# Altium PCB main.PcbDoc
Units mm, origin at the board's own origin, x right, y up, seen from the top; angles counter-clockwise.
Board outline 73 x 48 mm, 2 copper layers (Top Layer, Bottom Layer), stack 1.571 mm thick; 62 components, 45 nets, 224 pads, 122 vias.
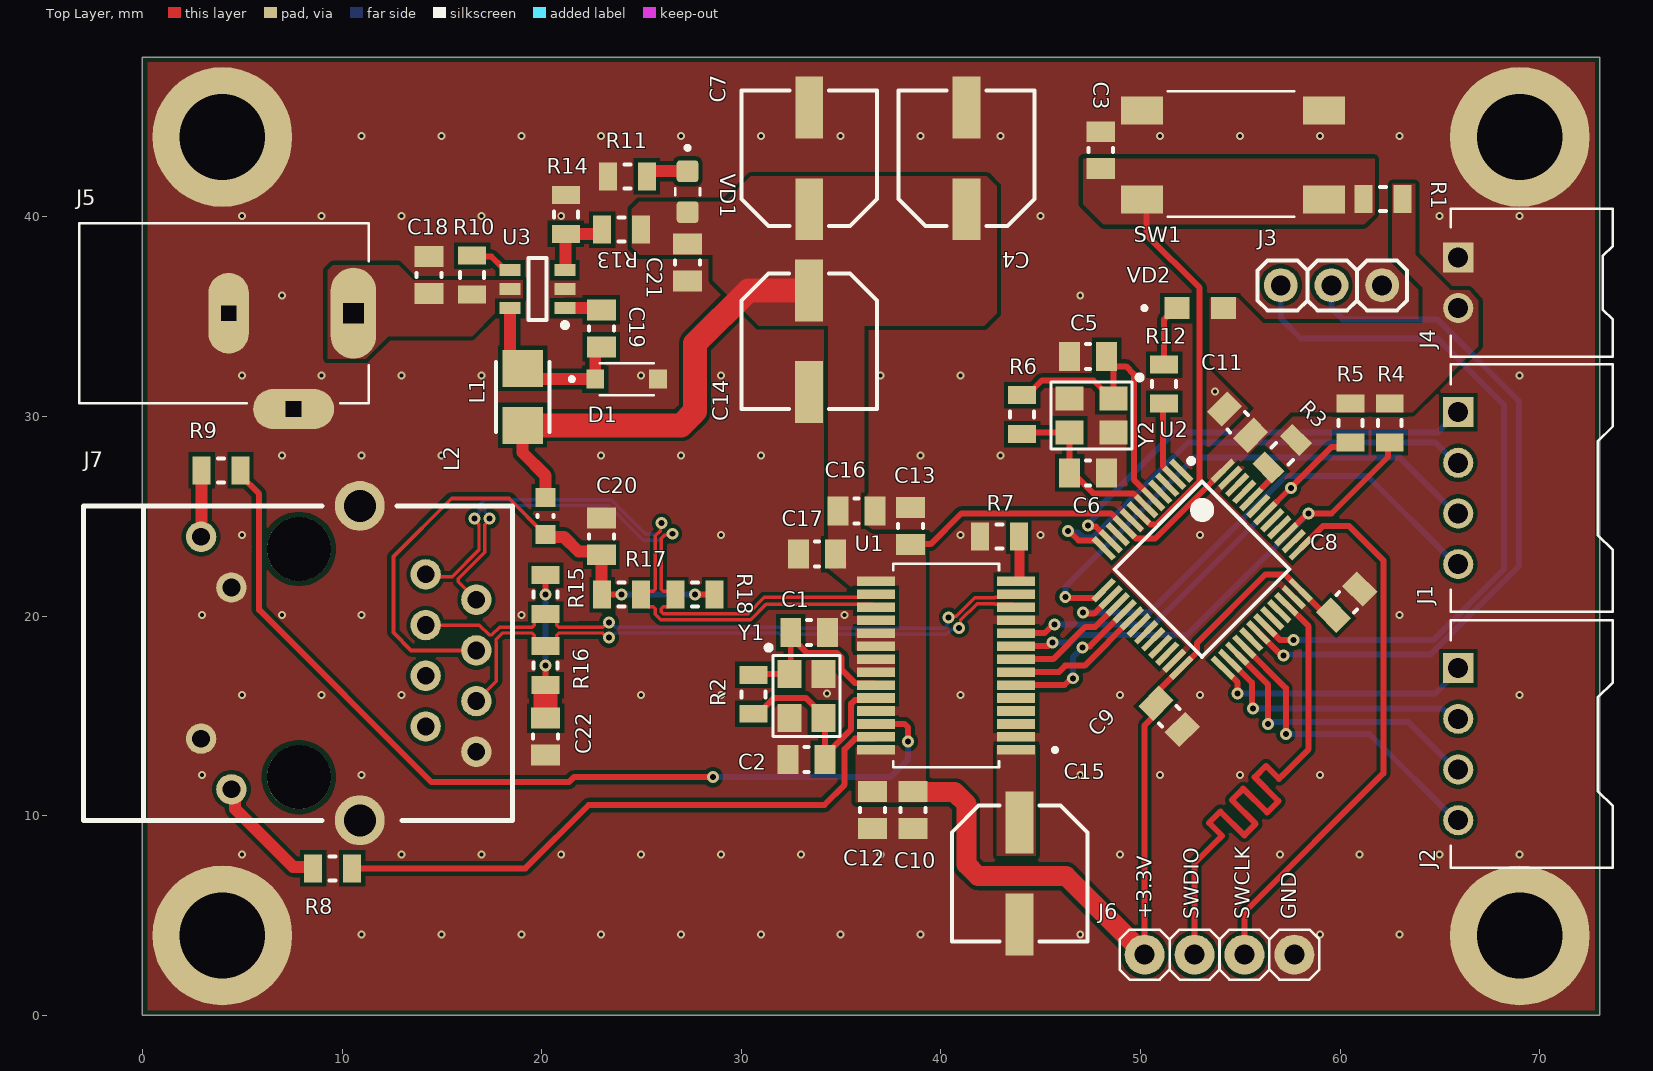
[diagram p0: Top Layer view]
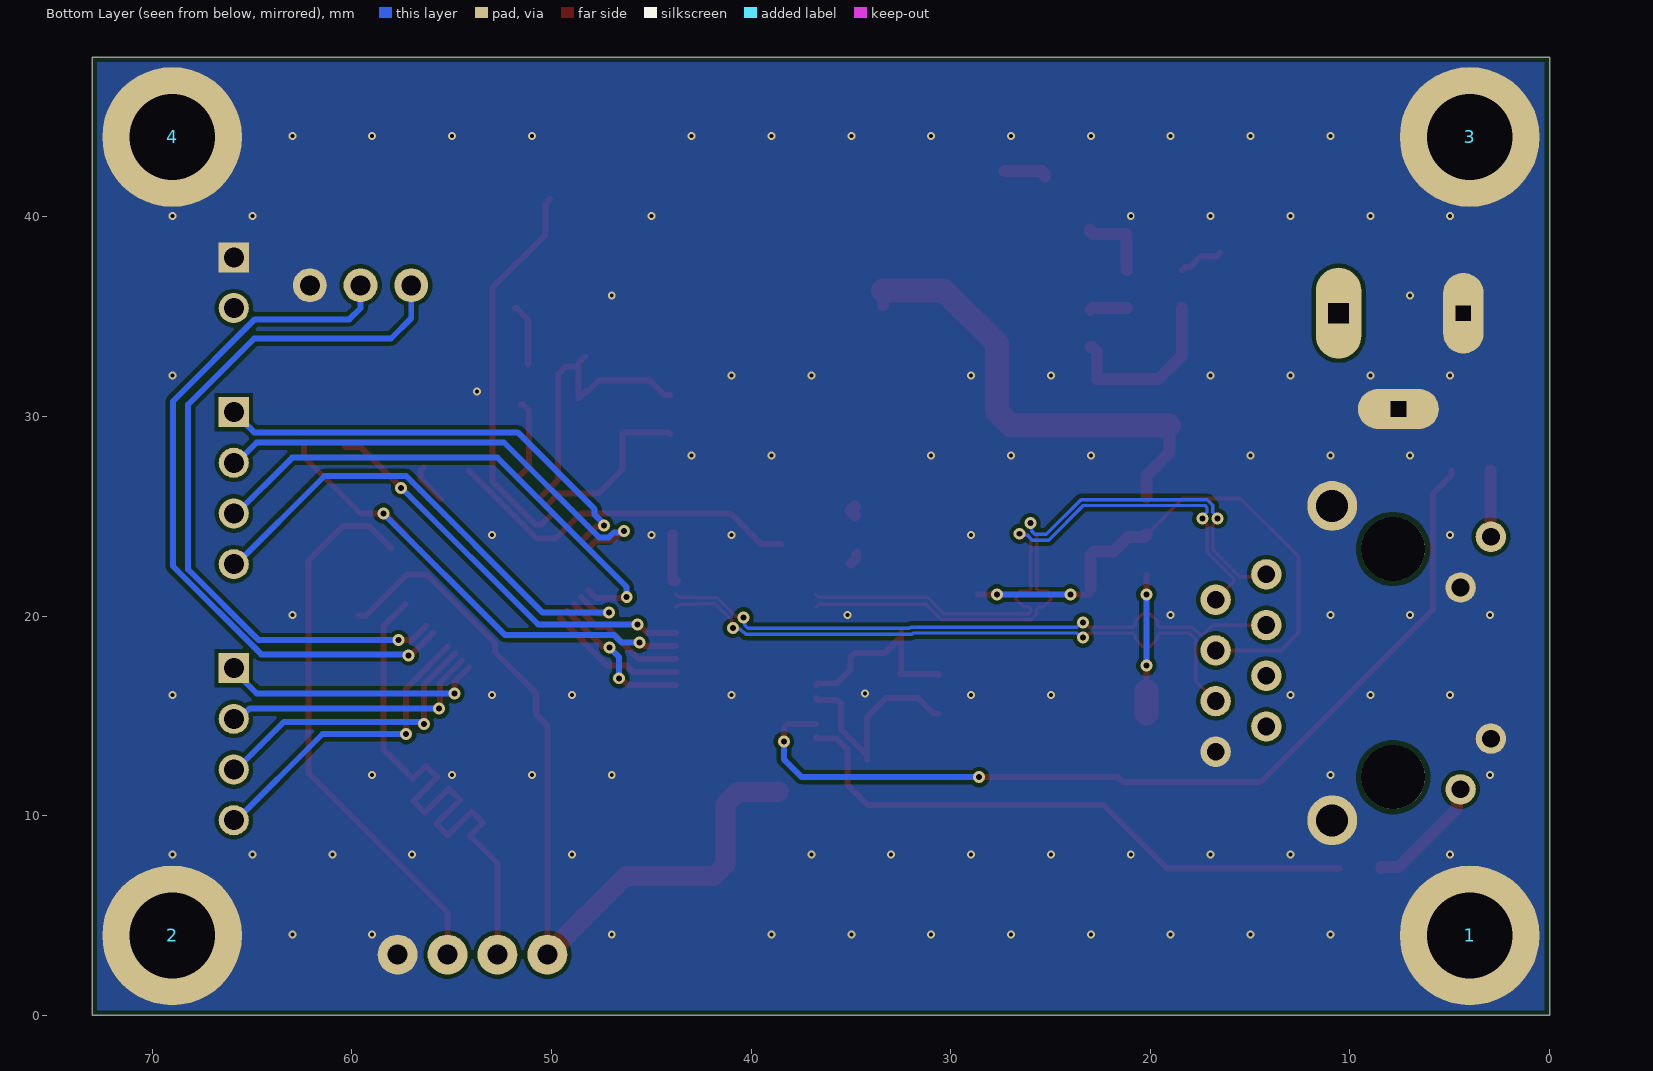
[diagram p1: Bottom Layer view, seen from below]

## Layer stack, top to bottom
Top Solder: solder mask 0.0102, Solder Resist, Dk 3.5
Top Layer: signal copper 0.0356
Dielectric 1: core 1.5, FR4 Tg135, Dk 4.5
Bottom Layer: signal copper 0.0356
Bottom Solder: solder mask 0.0102, Solder Resist, Dk 3.5

## Board outline
0,0 0,48 73,48 73,0

## Design rules (kind name [scope] priority, off if disabled: settings)
AcuteAngle [All] p1: minimum=3.50000000000000E+0001 checktracksonly=FALSE
BoardOutlineClearance "BoardOutlineClearance 1" [All] p1: gap=0.25 ignorepadtopadclearanceinfootprint=FALSE except(0: Arc-SplitContinuation Track-SplitContinuation SMDPad-SplitContinuation THPad-SplitContinuation Via-SplitContinuation Fill-SplitContinuation Poly-SplitContinuation Region-SplitContinuation Text-SplitContinuation) // Milling
BoardOutlineClearance "BoardOutlineClearance 2" [All] p2: gap=0.4 ignorepadtopadclearanceinfootprint=FALSE except(0: Arc-SplitContinuation Track-SplitContinuation SMDPad-SplitContinuation THPad-SplitContinuation Via-SplitContinuation Fill-SplitContinuation Poly-SplitContinuation Region-SplitContinuation Text-SplitContinuation) // V-Cut
Clearance "Clearance 3 Oz" [All] p1 off: gap=0.35 ignorepadtopadclearanceinfootprint=FALSE except(0.25: Arc-Hole Track-Hole SMDPad-Hole THPad-Hole Via-Hole Fill-Hole Poly-Hole Region-Hole Text-Hole)
Clearance "Clearance 2 Oz" [All] p2 off: gap=0.3 ignorepadtopadclearanceinfootprint=FALSE except(0.25: Arc-Hole Track-Hole SMDPad-Hole THPad-Hole Via-Hole Fill-Hole Poly-Hole Region-Hole Text-Hole)
Clearance "Clearance-1 1 Oz" [All] p3 off: gap=0.2 ignorepadtopadclearanceinfootprint=FALSE except(0.25: Arc-Hole Track-Hole SMDPad-Hole THPad-Hole Via-Hole Fill-Hole Poly-Hole Region-Hole Text-Hole) // Standart
Clearance "Clearance-2 1 Oz" [All] p4: gap=0.15 ignorepadtopadclearanceinfootprint=TRUE except(0.12: Track-Track; 0.2: Arc-Fill Arc-Poly Track-Fill Track-Poly SMDPad-Fill SMDPad-Poly THPad-Fill THPad-Poly Via-Fill Via-Poly Fill-Fill Fill-Poly Poly-Poly; 0.25: Arc-Hole Track-Hole SMDPad-Hole THPad-Hole Via-Hole Fill-Hole Poly-Hole Region-Hole Text-Hole) // Advance
Clearance "Clearance-1 1/2 Oz" [All] p5 off: gap=0.125 ignorepadtopadclearanceinfootprint=FALSE except(0.2: Arc-Fill Arc-Poly Track-Fill Track-Poly SMDPad-SMDPad SMDPad-Fill SMDPad-Poly THPad-Fill THPad-Poly Via-Fill Via-Poly Fill-Fill Fill-Poly Poly-Poly Poly-Region Poly-Text; 0.25: Arc-Hole Track-Hole SMDPad-Hole THPad-Hole Via-Hole Fill-Hole Poly-Hole Region-Hole Text-Hole) // Standart
Clearance "Clearance-2 1/2 Oz" [All] p6 off: gap=0.1 ignorepadtopadclearanceinfootprint=FALSE except(0.15: Arc-Fill Arc-Poly Track-Fill Track-Poly SMDPad-SMDPad SMDPad-Fill SMDPad-Poly THPad-Fill THPad-Poly Via-Fill Via-Poly Fill-Fill Fill-Poly Poly-Poly Poly-Region Poly-Text; 0.25: Arc-Hole Track-Hole SMDPad-Hole THPad-Hole Via-Hole Fill-Hole Poly-Hole Region-Hole Text-Hole) // Advance
DiffPairsRouting "Schematic Differential Pairs Routing_1" [InDifferentialPairClass('ETH_TX_IO_LINES')] p1: maxlimit=0.127 minlimit=0.127 mostfreqgap=0.127 toplayer_minwidth=0.17 toplayer_maxwidth=0.17 toplayer_prefwidth=0.17 bottomlayer_minwidth=0.17 bottomlayer_maxwidth=0.17 bottomlayer_prefwidth=0.17 impedanceprofiledriven=TRUE impedanceprofileid={BAA0B96C-9F9F-4328-87B9-B46D77609CF9} impedanceprofilevalue=100.000000 maxuncoupledlength=12.7
DiffPairsRouting "DiffPairsRoutingRx 1 Oz" [InDifferentialPairClass('ETH_RX_IO_LINES')] p2: maxlimit=0.127 minlimit=0.127 mostfreqgap=0.127 toplayer_minwidth=0.17 toplayer_maxwidth=0.17 toplayer_prefwidth=0.17 bottomlayer_minwidth=0.17 bottomlayer_maxwidth=0.17 bottomlayer_prefwidth=0.17 impedanceprofiledriven=TRUE impedanceprofileid={BAA0B96C-9F9F-4328-87B9-B46D77609CF9} impedanceprofilevalue=100.000000 maxuncoupledlength=12.7
HoleSize "Minimum HoleSize" [IsPad] p1: absolutevalues=TRUE maxlimit=5.9 minlimit=0.6 maxpercent=80.000 minpercent=20.000
HoleSize "Minimum HoleSize VIA 1" [IsVia] p2: absolutevalues=TRUE maxlimit=5.9 minlimit=0.3 maxpercent=80.000 minpercent=20.000 // Standart
HoleSize "Minimum HoleSize VIA 2" [IsVia] p3: absolutevalues=TRUE maxlimit=5.9 minlimit=0.2 maxpercent=80.000 minpercent=20.000 // Advance
HoleToHoleClearance Hole2HoleClearance [All] p1: gap=0.25 allowstackedmicrovias=FALSE
MinimumAnnularRing "Minimum AR VIA Standart" [IsVia] p1: minimumring=0.15
MinimumAnnularRing "Minimum AR PAD Standart" [IsPAD] p2: minimumring=0.2
MinimumAnnularRing "Minimum AR VIA Advance" [IsVia] p3: minimumring=0.1
MinimumAnnularRing "Minimum AR PAD Advance" [IsPAD] p4: minimumring=0.15
MinimumSolderMaskSliver "SolderMask Bridge Standart" [All] p1: minsoldermaskwidth=0.15 // All Masks
MinimumSolderMaskSliver "SolderMask Bridge Advance" [All] p2: minsoldermaskwidth=0.1 // Mask LDI
PlaneClearance "PlaneClearance 3 Oz" [All] p1: clearance=0.35
PlaneClearance "PlaneClearance 2 Oz" [All] p2: clearance=0.3
PlaneClearance "PlaneClearance 1 Oz" [All] p3: clearance=0.2
PlaneClearance "PlaneClearance-1 1/2 Oz" [All] p4: clearance=0.2 // Standart
PlaneClearance "PlaneClearance-2 1/2 Oz" [All] p5: clearance=0.15 // Advance
PlaneConnect "TermalConnect 3 Oz" [All] p1 off: planeconnectstyle=Relief reliefexpansion=0.2 reliefentries=4 reliefconductorwidth=0.35 reliefairgap=0.35 // Standart
PlaneConnect "TermalConnect 2 Oz" [All] p2 off: planeconnectstyle=Relief reliefexpansion=0.2 reliefentries=4 reliefconductorwidth=0.3 reliefairgap=0.3 // Standart
PlaneConnect "TermalConnect-1 1 Oz" [All] p3 off: planeconnectstyle=Relief reliefexpansion=0.2 reliefentries=4 reliefconductorwidth=0.2 reliefairgap=0.2 // Standart
PlaneConnect "TermalConnect-2 1 Oz" [All] p4: planeconnectstyle=Direct reliefexpansion=0.15 reliefentries=4 reliefconductorwidth=0.2 reliefairgap=0.2 // Advance
PlaneConnect "TermalConnect-1 1/2 Oz" [All] p5 off: planeconnectstyle=Relief reliefexpansion=0.2 reliefentries=4 reliefconductorwidth=0.2 reliefairgap=0.2 // Standart
PlaneConnect "TermalConnect-2 1/2 Oz" [All] p6 off: pad.planeconnectstyle=Relief pad.reliefexpansion=0.15 pad.reliefentries=4 pad.reliefconductorwidth=0.15 pad.reliefairgap=0.15 via.planeconnectstyle=Direct via.reliefexpansion=0.15 via.reliefentries=4 via.reliefconductorwidth=0.15 via.reliefairgap=0.15 // Advance
PolygonConnect "PolygonConnect 3 Oz" [All] p1 off: thpad.connectstyle=Relief thpad.reliefconductorwidth=0.35 thpad.reliefentries=4 thpad.polygonreliefangle="90 Angle" thpad.airgapwidth=0.35 smdpad.connectstyle=Relief smdpad.reliefconductorwidth=0.35 smdpad.reliefentries=4 smdpad.polygonreliefangle="90 Angle" smdpad.airgapwidth=0.35 via.connectstyle=Direct via.reliefconductorwidth=0.254 via.reliefentries=4 via.polygonreliefangle="90 Angle" via.airgapwidth=0.254
PolygonConnect "PolygonConnect 2 Oz" [All] p2 off: thpad.connectstyle=Relief thpad.reliefconductorwidth=0.3 thpad.reliefentries=4 thpad.polygonreliefangle="90 Angle" thpad.airgapwidth=0.3 smdpad.connectstyle=Relief smdpad.reliefconductorwidth=0.3 smdpad.reliefentries=4 smdpad.polygonreliefangle="90 Angle" smdpad.airgapwidth=0.3 via.connectstyle=Direct via.reliefconductorwidth=0.254 via.reliefentries=4 via.polygonreliefangle="90 Angle" via.airgapwidth=0.254
PolygonConnect "PolygonConnect-1 1 Oz" [All] p3 off: thpad.connectstyle=Relief thpad.reliefconductorwidth=0.2 thpad.reliefentries=4 thpad.polygonreliefangle="90 Angle" thpad.airgapwidth=0.2 smdpad.connectstyle=Relief smdpad.reliefconductorwidth=0.2 smdpad.reliefentries=4 smdpad.polygonreliefangle="90 Angle" smdpad.airgapwidth=0.2 via.connectstyle=Direct via.reliefconductorwidth=0.254 via.reliefentries=4 via.polygonreliefangle="90 Angle" via.airgapwidth=0.254 // Standart
PolygonConnect "PolygonConnect-2 1 Oz" [All] p4: connectstyle=Direct reliefconductorwidth=0.15 reliefentries=4 polygonreliefangle="90 Angle" airgapwidth=0.15 // Advance
PolygonConnect "PolygonConnect-1 1/2 Oz" [All] p5 off: thpad.connectstyle=Relief thpad.reliefconductorwidth=0.15 thpad.reliefentries=4 thpad.polygonreliefangle="90 Angle" thpad.airgapwidth=0.2 smdpad.connectstyle=Relief smdpad.reliefconductorwidth=0.2 smdpad.reliefentries=4 smdpad.polygonreliefangle="90 Angle" smdpad.airgapwidth=0.2 via.connectstyle=Direct via.reliefconductorwidth=0.254 via.reliefentries=4 via.polygonreliefangle="90 Angle" via.airgapwidth=0.254 // Standart
PolygonConnect "PolygonConnect-2 1/2 Oz" [All] p6 off: thpad.connectstyle=Relief thpad.reliefconductorwidth=0.125 thpad.reliefentries=4 thpad.polygonreliefangle="90 Angle" thpad.airgapwidth=0.15 smdpad.connectstyle=Relief smdpad.reliefconductorwidth=0.125 smdpad.reliefentries=4 smdpad.polygonreliefangle="90 Angle" smdpad.airgapwidth=0.15 via.connectstyle=Direct via.reliefconductorwidth=0.254 via.reliefentries=4 via.polygonreliefangle="90 Angle" via.airgapwidth=0.254 // Advance
RoutingCorners [All] p1 off: cornerstyle=45-Degree minsetback=2.54 maxsetback=2.54
RoutingVias [All] p1: holewidth=0.3 width=0.6 viastyle="Through Hole" minholewidth=0.2 minwidth=0.4 maxholewidth=5.9 maxwidth=6.4
SilkToSilkClearance Silk2SilkClearance [All] p1 off: silktosilkclearance=0.15
SilkToSolderMaskClearance Silk2SolderMaskClearance [IsPad] p1 off: minsilkscreentomaskgap=0.15 clearancetoexposedcopper=TRUE
SolderMaskExpansion SolderMaskExpansion-1 [All] p1: expansion=0.05 istentingtop=FALSE // Standart
SolderMaskExpansion "SolderMaskExpansion LDI" [All] p2: expansion=0.025 istentingtop=FALSE // Advance
UnRoutedNet [All] p1: checkbadconnections=TRUE
Width "Width 3 Oz" [All] p1 off: maxlimit=10 minlimit=0.35 preferedwidth=0.4 checkconnectedcopper=TRUE
Width "Width 2 Oz" [All] p2 off: maxlimit=10 minlimit=0.3 preferedwidth=0.35 minimp=50.000000 maximp=50.000000 favimp=50.000000 checkconnectedcopper=TRUE
Width "Width 1 Oz" [All] p3: maxlimit=1.2 minlimit=0.2 preferedwidth=0.3 checkconnectedcopper=TRUE
Width "Width 1/2 Oz" [All] p4 off: maxlimit=10 minlimit=0.1 preferedwidth=0.125 checkconnectedcopper=TRUE
20 further rules are at their usual default settings.

## Classes and differential pairs
differential pair class ETH_TX_IO_LINES: TPOUT
differential pair class ETH_RX_IO_LINES: TPIN
net class Ethernet: TPIN_N TPIN_P TPOUT_N TPOUT_P
differential pair TPOUT: +TPOUT_P -TPOUT_N
differential pair TPIN: +TPIN_P -TPIN_N

## Components (designator, comment, footprint, x,y, rotation, side; value= is the part's Value field where it differs from the comment)
1 "SMTSO_STAND_M3" M3x1 4,4 r90 bottom
2 "SMTSO_STAND_M3" M3x1 69,4 r90 bottom
3 "SMTSO_STAND_M3" M3x1 4,44 r90 bottom
4 "SMTSO_STAND_M3" M3x1 69,44 r90 bottom
C1 "22pF" 0805_MD_CAPC2012X05N 33.401,19.171 r180 top
C2 "22pF" 0805_MD_CAPC2012X05N 33.274,12.821 r0 top
C3 "1uF" 0805_MD_CAPC2012X05N 48.006,43.337 r90 top
C4 "2.2uF" 6.3x5.4_HD_CAPAE7266X54L 41.277,42.932 r90 top
C5 "10pF" 0805_MD_CAPC2012X05N 47.371,33.014 r0 top
C6 "10pF" 0805_MD_CAPC2012X05N 47.371,27.172 r180 top
C7 "2.2uF" 6.3x5.4_HD_CAPAE7266X54L 33.403,42.932 r90 top
C8 "100nF" 0805_MD_CAPC2012X05N 60.325,20.695 r45 top
C9 "100nF" 0805_MD_CAPC2012X05N 51.435,14.98 r315 top
C10 "100nF" 0805_MD_CAPC2012X05N 38.608,10.281 r270 top
C11 "100nF" 0805_MD_CAPC2012X05N 54.864,29.712 r135 top
C12 "10nF" 0805_MD_CAPC2012X05N 36.576,10.281 r90 top
C13 "10nF" 0805_MD_CAPC2012X05N 38.481,24.505 r270 top
C14 "10uF" 6.3x5.4_HD_CAPAE7266X54L 33.401,33.766 r270 top
C15 "10uF" 6.3x5.4_HD_CAPAE7266X54L 43.942,7.106 r270 top
C16 "10nF" 0805_MD_CAPC2012X05N 35.778,25.267 r0 top
C17 "10nF" 0805_MD_CAPC2012X05N 33.782,23.108 r180 top
C18 "10uF" 0805_MD_CAPC2012X05N 14.351,37.078 r90 top
C19 "100nF" 0805_MD_CAPC2012X05N 22.987,34.411 r270 top
C20 "10nF" 0805_MD_CAPC2012X05N 22.987,23.997 r90 top
C21 "10uF" 0805_MD_CAPC2012X05N 27.305,37.713 r270 top
C22 "10nF" 0805_MD_CAPC2012X05N 20.193,13.964 r270 top
D1 "SD103AW_RHG" DIO_SD103AW_RHG 24.257,31.871 r0 top
J1 "HX2.54-4P" JST_S4B-XH-A(LF)(SN) 65.913,26.41 r270 top
J2 "HX2.54-4P" JST_S4B-XH-A(LF)(SN) 65.913,13.583 r270 top
J3 "PLS-3" PLS-1-3 57.023,36.57 r90 top
J4 "HX2.54-2P" JST_S2B-XH-A(LF)(SN) 65.913,36.697 r270 top
J5 "RAPC712BKZ" SWITCHCRAFT_RAPC712BKZ 4.318,35.173 r270 top
J6 "SWD" SWD-4 55.205,3.042 r90 top
J7 "RJ-45 Jack" J011D21BNL 7.747,17.52 r270 top
L1 "22uH" LQH32P_MD_INDP3225X17N 19.05,30.982 r270 top
L2 "L" 0603_LD_RESC1608X06M 20.193,25.013 r270 top
R1 "10k" 0805_MD_RESC2012X06N 62.144,40.888 r0 top
R2 "1M" 0805_MD_RESC2012X06N 30.607,16.082 r90 top
R3 "10k" 0805_MD_RESC2012X06N 57.096,28.134 r225 top
R4 "10k" 0805_MD_RESC2012X06N 62.484,29.671 r90 top
R5 "10k" 0805_MD_RESC2012X06N 60.515,29.671 r90 top
R6 "1M" 0805_MD_RESC2012X06N 44.069,30.093 r90 top
R7 "10k" 0805_MD_RESC2012X06N 42.926,23.997 r0 top
R8 "10k" 0805_MD_RESC2012X06N 9.525,7.36 r0 top
R9 "10k" 0805_MD_RESC2012X06N 3.937,27.299 r0 top
R10 "10k" 0805_MD_RESC2012X06N 16.51,37.078 r270 top
R11 "510" 0805_MD_RESC2012X06N 24.298,42.031 r180 top
R12 "510" 0805_MD_RESC2012X06N 51.181,31.617 r270 top
R13 "" 0805_MD_RESC2012X06N 24.003,39.364 r0 top
R14 "" 0805_MD_RESC2012X06N 21.209,40.126 r270 top
R15 "49.9" 0805_MD_RESC2012X06N 20.193,21.076 r90 top
R16 "49.9" 0805_MD_RESC2012X06N 20.193,17.52 r270 top
R17 "49.9" 0805_MD_RESC2012X06N 24.003,21.076 r180 top
R18 "49.9" 0805_MD_RESC2012X06N 27.686,21.076 r0 top
SW1 "LL3301" LL3301 50.082,45.333 r270 top
U1 "ENC28J60/SS" SOP65P780X200-28N 40.259,17.52 r180 top
U2 "GD32F103C8T6" QFP48_MD_TSQFP50P900X900X120-48N 53.086,22.346 r315 top
U3 "AOZ1282CI" SOT23_6_MD_SOT95P280X125-6N 19.79,36.377 r180 top
VD1 "LED" LEDSC125X200X90-2N 27.305,41.26 r270 top
VD2 "LED" LED_APT2012MGC 52.991,35.427 r0 top
Y1 "3225" YANGXING_SMD_3225_4L 33.274,16.002 r270 top
Y2 "X32258MOB4SI" YANGXING_SMD_3225_4L 47.541,30.054 r180 top

## Footprints (in the part's own frame and the unit in brackets; to place one, negate y for a bottom-side part, rotate by r counter-clockwise, add the part's x,y. Pads: shape width x height; smd on the part's side, far side on the other; paste and mask are expansions set on the pad)
6.3x5.4_HD_CAPAE7266X54L [mm] "Aluminum Electrolytic Capacitor, Body 6.60x6.60x5.40mm, IPC High Density"
  rect 3.1x1.4 smd: 1(-2.55,0) 2(2.55,0)
  silkscreen extent -3.4,-3.4 3.4,3.4, body extent -3.9,-3.3 3.9,3.3, height 5.4
0603_LD_RESC1608X06M [mm] "Chip Resistor, 2-Leads, Body 1.60x0.80mm, IPC Low Density"
  rect 0.95x1 smd: 1(-0.925,0) 2(0.925,0)
  silkscreen extent -0.05,-0.4 0.05,0.4, body extent -0.8,-0.4 0.8,0.4, height 0.8
0805_MD_CAPC2012X05N [mm] "Chip Capacitor, 2-Leads, Body 2.00x1.25mm, IPC Medium Density"
  rect 1.05x1.45 smd: 1(-0.925,0) 2(0.925,0)
  silkscreen extent -0.1,-0.63 0.1,0.63, body extent -1,-0.63 1,0.63, height 1.25
0805_MD_RESC2012X06N [mm] "Chip Resistor, 2-Leads, Body 2.00x1.25mm, IPC Medium Density"
  rect 0.9x1.4 smd: 1(-0.975,0) 2(0.975,0)
  silkscreen extent -0.15,-0.6 0.15,0.6, body extent -1,-0.6 1,0.6, height 0.45
DIO_SD103AW_RHG [mm]
  rect 0.9x0.95 smd: A(1.575,0) C(-1.575,0)
  silkscreen extent -2.85,-0.8 1.35,0.8
J011D21BNL [mm] "RJ45 Jack with Transformers and Lights"
  round 1.524 hole 0.89: 1(-4.57,6.44) 2(-3.3,8.98) 3(-2.03,6.44) 4(-0.76,8.98) 5(0.51,6.44) 6(1.78,8.98) 7(3.05,6.44) 8(4.32,8.98) 9(-6.45,-4.81) 10(-3.91,-3.29) 11(3.66,-4.81) 12(6.2,-3.29)
  round 2.5 hole 1.6: 13(-8,3.14) 14(7.75,3.14)
  round 3.2 hole 3.2 unplated: 15(-5.84,0.09) 16(5.59,0.09)
  silkscreen extent -8,-10.7 7.75,10.8, body extent -8.5,-10.8 8.5,11.25, height 13.8
JST_S2B-XH-A(LF)(SN) [mm]
  rect 1.508x1.508 / inner round 1.508 / far side rect 1.508x1.508 hole 1: 1(-1.27,0)
  round 1.508 hole 1: 2(1.27,0)
  silkscreen extent -3.7,-0.38 3.7,7.75, body extent -3.61,-0.38 3.61,7.66, height 5.89
JST_S4B-XH-A(LF)(SN) [mm]
  rect 1.508x1.508 / inner round 1.508 / far side rect 1.508x1.508 hole 1: 1(-3.81,0)
  round 1.508 hole 1: 2(-1.27,0) 3(1.27,0) 4(3.81,0)
  silkscreen extent -6.2,-0.38 6.2,7.75, body extent -6.15,-0.38 6.15,7.66, height 5.84
LED_APT2012MGC [mm]
  rect 1.25x1.1 smd: A(1.175,0) C(-1.175,0)
  silkscreen extent -2.9,-0.1 -2.7,0.1, body extent -1,-0.63 1,0.63, height 0.75
LEDSC125X200X90-2N [mm]
  rrect25% 1.07x1.08 smd: A(1.025,0) C(-1.025,0)
  silkscreen extent -2.3,-0.63 0.17,0.63, body extent -1,-0.63 1,0.63, height 0.7
LL3301 [mm]
  rect 1.4x2.1 smd mask+0.05: 1(0,9.1) 1(0,0) 2(4.46,9.1) 2(4.46,0)
  silkscreen extent -0.95,1.27 5.33,7.63, body extent -0.79,-0.42 5.21,9.58, height 4.3
LQH32P_MD_INDP3225X17N [mm] "Precision Wire Wound Inductor, 2-Leads, Body 3.20x2.50mm, IPC Medium Density"
  rect 1.85x2.05 smd: 1(-1.425,0) 2(1.425,0)
  silkscreen extent -1.75,-1.35 1.75,1.35, body extent -1.6,-1.25 1.6,1.25, height 1.7
M3x1 [mm]
  round 7 hole 4.3: 1(0,0)
  body extent -2.8,-2.79 2.8,2.79, height 1.03
PLS-1-3 [mm]
  round 1.7 hole 1 paste-2539.97: 1(0,0) 2(0,-2.54) 3(0,-5.08)
  silkscreen extent -1.25,-6.33 1.25,1.17, body extent -1.27,-6.35 1.27,1.27, height 8.44
QFP48_MD_TSQFP50P900X900X120-48N [mm] "TSQFP, 48-Leads, Body 7.00x7.00mm, Pitch 0.50mm, IPC Medium Density"
  rect 1.45x0.3 smd: 1(-4.225,2.75) 2(-4.225,2.25) 3(-4.225,1.75) 4(-4.225,1.25) 5(-4.225,0.75) 6(-4.225,0.25) 7(-4.225,-0.25) 8(-4.225,-0.75) 9(-4.225,-1.25) 10(-4.225,-1.75) 11(-4.225,-2.25) 12(-4.225,-2.75) 25(4.225,-2.75) 26(4.225,-2.25) 27(4.225,-1.75) 28(4.225,-1.25) 29(4.225,-0.75) 30(4.225,-0.25) 31(4.225,0.25) 32(4.225,0.75) 33(4.225,1.25) 34(4.225,1.75) 35(4.225,2.25) 36(4.225,2.75)
  rect 0.3x1.45 smd: 13(-2.75,-4.225) 14(-2.25,-4.225) 15(-1.75,-4.225) 16(-1.25,-4.225) 17(-0.75,-4.225) 18(-0.25,-4.225) 19(0.25,-4.225) 20(0.75,-4.225) 21(1.25,-4.225) 22(1.75,-4.225) 23(2.25,-4.225) 24(2.75,-4.225) 37(2.75,4.225) 38(2.25,4.225) 39(1.75,4.225) 40(1.25,4.225) 41(0.75,4.225) 42(0.25,4.225) 43(-0.25,4.225) 44(-0.75,4.225) 45(-1.25,4.225) 46(-1.75,4.225) 47(-2.25,4.225) 48(-2.75,4.225)
  silkscreen extent -4.35,-3.1 3.1,3.57, body extent -4.5,-4.5 4.5,4.5, height 1.1
SOP65P780X200-28N [mm]
  rect 1.9x0.48 smd mask+0.05: 1(-3.505,4.225) 2(-3.505,3.575) 3(-3.505,2.925) 4(-3.505,2.275) 5(-3.505,1.625) 6(-3.505,0.975) 7(-3.505,0.325) 8(-3.505,-0.325) 9(-3.505,-0.975) 10(-3.505,-1.625) 11(-3.505,-2.275) 12(-3.505,-2.925) 13(-3.505,-3.575) 14(-3.505,-4.225) 15(3.505,-4.225) 16(3.505,-3.575) 17(3.505,-2.925) 18(3.505,-2.275) 19(3.505,-1.625) 20(3.505,-0.975) 21(3.505,-0.325) 22(3.505,0.325) 23(3.505,0.975) 24(3.505,1.625) 25(3.505,2.275) 26(3.505,2.925) 27(3.505,3.575) 28(3.505,4.225)
  silkscreen extent -5.56,-5.1 2.65,5.1, body extent -3.9,-5.1 3.9,5.1, height 2
SOT23_6_MD_SOT95P280X125-6N [mm] "SOT23, 6-Leads, Body 2.90x2.80mm, Pitch 0.95mm, IPC Medium Density"
  rect 1.05x0.6 smd: 1(-1.375,0.95) 2(-1.375,0) 3(-1.375,-0.95) 4(1.375,-0.95) 5(1.375,0) 6(1.375,0.95)
  silkscreen extent -1.5,-1.55 0.45,1.92, body extent -1.4,-1.45 1.4,1.45, height 1.55
SWD-4 [mm]
  round 2 hole 1: 1(0,5) 2(0,2.5) 3(0,0) 4(0,-2.5)
  silkscreen extent -1.25,-3.75 1.25,6.25, body extent -1.27,-3.77 1.27,6.27, height 8.44
SWITCHCRAFT_RAPC712BKZ [mm]
  oval 4.56x2.28 hole 1.02 square: PIN(0,6.25)
  oval 2.025x4.05 hole 0.76 square: SHUNT(4.8,3.25)
  oval 4.05x2.025 hole 0.76 square: SLEEVE(0,0)
  silkscreen extent -4.5,-7.49 4.5,7.01, body extent -4.45,-7.37 5.08,7.11, height 10.92
YANGXING_SMD_3225_4L [mm]
  rect 1.4x1.2 smd: 1(-1.1,-0.85) 2(-1.1,0.85) 2(1.1,-0.85) 3(1.1,0.85)
  silkscreen extent -2.51,-2 2.03,1.68, body extent -1.6,-1.25 1.6,1.25, height 0.65

## Part data
1 2 3 4: Package=SMTJ_stand_m3_NEW, DeviceSetName=SMTSO_STAND_M3, GateName_1=PART_1, LibraryName=SMTSO, SymbolName_1=SMTSO_STAND_M3
C1 C2 C3 C5 C6 C8 C9 C10 C11 C12 C13 C16 C17 C20 C22: library part C, "Capacitor"
  C1 C2 C5 C6: CompCode=1353
  C3: CompCode=909
  C8 C9 C10 C11 C12 C13 C16 C17 C20 C22: CompCode=6294
C4 C7 C14 C15: library part CP, "Capacitors IPC"
C18 C19 C21: library part C, "Capacitors IPC"
D1: Package=None, AVAILABILITY=Unavailable, MP=SD103AW_RHG, PRICE=None
J1 J2: "JST HX 2.54 4P", CompCode=1615
J4: "JST HX 2.54 2P", CompCode=395
J5: "Power Barrel Connector Jack 2.50mm ID (0.098), 5.50mm OD (0.217) Through Hole, Right Angle", Package=None, AVAILABILITY="In Stock", CHECK_PRICES=https://www.snapeda.com/parts/RAPC712BKZ/Conxall%252FSwitchcraft/view-part/?ref=eda, MF="Switchcraft Conxall", MP=RAPC712BKZ, PRICE=None, Purchase-URL=https://pricing.snapeda.com/search?q=RAPC712BKZ&ref=eda, SNAPEDA_LINK=https://www.snapeda.com/parts/RAPC712BKZ/Conxall%252FSwitchcraft/view-part/?ref=snap
J6: library part SWD_4, "SWD connector", CompCode=6025
J7: "Ethernet jack"
L1: library part L, "Inductor IPC"
L2: "Inductor IPC"
R1 R2 R3 R6 R11 R12: library part R, "Resistor"
  R1 R3 R11 R12: CompCode=652
  R2 R6: CompCode=1100
R4 R5 R7 R8 R9 R10 R13 R14 R15 R16 R17 R18: library part R, "Resistors IPC"
SW1: Package=Soft_smd_6x6, CompCode=4234, DeviceSetName=SOFT_BUTTON_SMD_6X6, GateName_1=PART_1, LibraryName=Buttons, SymbolName_1=SOFT_BUTTON_SMD_6X6
U1: "28 Pin, 8 KB RAM, MAC&PHY, Ethernet Controller", Package="SSOP-28 Microchip", CHECK_PRICES=https://www.snapeda.com/parts/ENC28J60/SS/Microchip/view-part/?ref=eda, MF=Microchip, MP=ENC28J60/SS, SNAPEDA_LINK=https://www.snapeda.com/parts/ENC28J60/SS/Microchip/view-part/?ref=snap
U2: library part STM32F103C8T6, "The STM32F103xx performance line family incorporates the high-performance ARM / Cortex-M3 32-bit RISC core operating at a 72 MHz frequency, high-speed embedded / memories (Flash memory up to 128Kbytes and SRAM up to 20 Kbytes), and an extensive / range of enhanced I/Os and peripherals connected to two APB buses. All devices offer two / 12-bit ADCs, three general purpose 16-bit timers plus one PWM timer, as well as standard / and advanced communication interfaces: up to two I2Cs and SPIs, three USARTs, an USB / and a CAN. / The STM32F103xx performance line family operates in the −40 to +105 °C temperature / range, from a 2.0 to 3.6 V power supply. A comprehensive set of power-saving mode allows / to design low-power applications. / The complete STM32F103xx performance line family includes devices in 5 different / package types: from 36 pins to 100 pins. Depending on the device chosen, different sets of / peripherals are included, the description below gives an overview of the complete range of / peripherals proposed in this family.", Package=LQFP48_7x7, CompCode=2993, Datasheet=Q:/Software/Altium/Datasheets/STM32F103C8T6.pdf, DeviceSetName=STM32F103C8T6, GateName_1=PART_1, LibraryName=MCU, SymbolName_1=GD32F103C8T6
U3: "EZBuck™ 1.2A Simple Buck Regulator. Fixed 450kHz PWM operation, 4.5V to 36V operating input voltage range", MANUFACTURER="Alpha & Omega", Package=SOT23-6P95_270X145L35X35L, CompCode=6619, Datasheet=Q:\Software\Altium\Datasheets\AOZ1282CI.pdf, DeviceSetName=AOZ1282CI, GateName_1=PART_1, LibraryName="DC-DC IC", SymbolName_1=AOZ1280CI
VD1 VD2: Package=LED_3mm_DIP_Blue, DeviceSetName=LED_3MM_DIP_BLUE, GateName_1=PART_1, LibraryName=LED, SymbolName_1=LED_1204_R/A
Y1: Package=YANGXING_SMD_3225_4L, DeviceSetName=AV08000301, GateName_1=PART_1, LibraryName="Crystal Oscillator", SymbolName_1=AV08000301
Y2: library part 3225, "Резонатор кварцевый 8MHz, ±10ppm... ±30ppm, 12пФ, SMD3225, -40...+85C", Package=YANGXING_SMD_3225_4L, CompCode=7637, DeviceSetName=AV08000301, GateName_1=PART_1, LibraryName="Crystal Oscillator", SymbolName_1=AV08000301
J3: CompCode=2145

## Via types
v1: diameter 0.4, hole 0.2, Top Layer to Bottom Layer, 92 vias
v2: diameter 0.6, hole 0.3, Top Layer to Bottom Layer, tented both sides, 30 vias

## Nets (pads, with @x,y where several pads share a name; then routed paths per layer and width w, separated by ;. In a path a pad name is that pad's centre, name@x,y a point inside that pad or via, vN(x,y) a via of type N, cw(c..) or ccw(c..) an arc to the next point about the centre after c; other vN are vias at no path point)
3V3: C4.1 C7.1 C8.1 C9.1 C10.1 C11.1 C12.2 C13.2 C14.1 C16.1 C17.1 C21.1 J4.2 J6.1 L1.2 L2.1 R1.2 R4.2 R5.2 R13.2 U1.15 U1.19 U1.20 U1.25 U1.28 U2.9 U2.24 U2.36 U2.48 VD1.A VD2.A | length 86
  Top Layer w0.3: C13.2 38.5,23.599 39.48,23.599 41.021,25.14 48.524,25.14 49.78,23.884 50.735,23.884 U2.48 ; J6.1 50.205,14.528 50.781,15.104 C9.1 50.781,16.152 52.832,18.203 52.832,18.663 56.261,22.092 57.229,22.092 U2.36 59.28,20.041 C8.1
  Top Layer w0.5: C17.1 34.707,22.908 34.982,22.633 C17.1@35.022,22.633
  Top Layer w0.6: L1.2 19.05,28.188 20.193,27.045 L2.1 ; C14.1@33.401,35.555 C14.1 ; C16.1@34.798,25.049 35.016,25.267 C16.1@34.798,25.485
  Top Layer w1: C10.1 38.633,11.181 40.689,11.181 41.275,10.595 41.275,7.565 41.861,6.979 46.268,6.979 J6.1
  Top Layer w1.2: L1.2 26.983,29.557 27.686,30.26 27.686,33.649 30.353,36.316 C14.1
12V_BST: C19.1 U3.1 | length 1.9
  Top Layer w0.6: U3.1 22.896,35.427 C19.1
12V_EN: R10.1 U3.4 | length 2.3
  Top Layer w0.3: R10.1@16.51,38.18 16.681,38.009 17.484,38.009 18.016,37.477 18.265,37.477 U3.4
12V_FB: R13.1 R14.2 U3.3 | length 3.8
  Top Layer w0.6: U3.3 21.187,37.327 21.187,39.129 R14.2 22.878,39.151 23.028,39.301 R13.1
12V_LX: C19.2 D1.C L1.1 U3.6 | length 8.9
  Top Layer w0.6: U3.6 18.415,33.032 19.04,32.407 L1.1 19.586,31.871 D1.C 22.682,33.261 22.907,33.486 C19.2
+12V: C18.1 J5.PIN R10.2 U3.5
CH1: J1.1 U2.11 | length 22.6
  Top Layer w0.3: v2(47.371,24.54) 47.428,24.483 47.767,24.483 U2.11
  Bottom Layer w0.3: v2(47.371,24.54) 47.371,24.621 47.834,25.085 47.834,25.349 51.689,29.204 64.897,29.204 J1.1
CH2: J1.2 U2.12 | length 24.3
  Top Layer w0.3: v2(46.355,24.251) 46.436,24.251 46.892,23.796 47.747,23.796 U2.12
  Bottom Layer w0.3: v2(46.355,24.251) 46.412,24.194 46.869,24.194 47.122,23.94 47.62,23.94 52.376,28.696 64.77,28.696 J1.2@65.913,27.553
CH3: J1.3 U2.13 | length 26.2
  Top Layer w0.3: v2(46.228,20.949) 46.281,20.896 47.747,20.896 U2.13
  Bottom Layer w0.3: v2(46.228,20.949) 46.228,21.457 52.705,27.934 62.992,27.934 J1.3@65.913,25.013
CH4: J1.4 U2.14 | length 25.3
  Top Layer w0.3: v2(47.117,20.176) 47.174,20.118 47.675,20.118 ; 47.675,20.117 U2.14
  Bottom Layer w0.3: v2(47.117,20.176) 50.442,20.176 57.282,27.016 61.37,27.016 J1.4@65.913,22.473
CH5: J2.1 U2.25 | length 13.1
  Top Layer w0.3: U2.25 54.867,16.676 54.867,16.126 v2(54.864,16.123)
  Bottom Layer w0.3: v2(54.864,16.123) 64.77,16.123 J2.1@65.913,17.266
CH6: J2.2 U2.26 | length 13.4
  Top Layer w0.3: U2.26 55.583,16.667 55.583,15.404 v2(55.626,15.361)
  Bottom Layer w0.3: v2(55.626,15.361) 65.133,15.361 65.768,14.726 J2.2@65.913,14.726
CH7: J2.3 U2.27 | length 14.8
  Top Layer w0.3: U2.27 56.388,16.569 v2(56.388,14.599)
  Bottom Layer w0.3: v2(56.388,14.599) 56.469,14.599 56.561,14.691 63.408,14.691 J2.3@65.913,12.186
CH8: J2.4 U2.28 | length 15.7
  Top Layer w0.3: U2.28 57.277,16.387 v2(57.277,14.091)
  Bottom Layer w0.3: v2(57.277,14.091) 61.468,14.091 J2.4@65.913,9.646
CS: R4.1 U1.9 U2.39 | length 24.9
  Top Layer w0.3: U1.9 45.384,18.495 45.555,18.666 v2(45.59,18.666) ; U2.39 58.355,25.14 v2(58.42,25.14) 59.563,25.14 62.395,27.972 62.395,28.607 R4.1
  Bottom Layer w0.3: v2(45.59,18.666) 46.485,18.666 46.859,19.04 52.32,19.04 v2(58.42,25.14)
GND: 1.1 2.1 3.1 4.1 C1.1 C2.1 C3.2 C4.2 C5.1 C6.1 C7.2 C8.2 C9.2 C10.2 C11.2 C12.1 C13.1 C14.2 C15.2 C16.2 C17.2 C18.2 C20.2 C21.2 C22.2 D1.A J3.3 J4.1 J5.SHUNT J5.SLEEVE J6.4 J7.8 J7.10 J7.11 J7.13 J7.14 R3.1 R7.1 R11.2 R14.1 SW1.1 U1.2 U1.11 U1.18 U1.21 U1.22 U2.8 U2.23 U2.35 U2.47 U3.2 Y1.2 Y2.2
  other v1: 10.979,4.05 14.979,4.05 18.979,4.05 22.979,4.05 26.979,4.05 30.979,4.05 34.979,4.05 38.979,4.05 46.979,4.05 58.979,4.05 62.979,4.05 4.979,8.05 12.979,8.05 16.979,8.05 20.979,8.05 24.979,8.05 28.979,8.05 32.979,8.05 36.979,8.05 48.979,8.05 56.979,8.05 60.979,8.05 64.979,8.05 68.979,8.05 2.979,12.05 10.979,12.05 46.979,12.05 50.979,12.05 54.979,12.05 58.979,12.05 4.979,16.05 8.979,16.05 12.979,16.05 24.979,16.05 28.979,16.05 40.979,16.05 48.979,16.05 52.979,16.05 68.979,16.05 34.29,16.129 2.979,20.05 6.979,20.05 10.979,20.05 18.979,20.05 35.179,20.066 62.979,20.05 4.979,24.05 28.979,24.05 40.979,24.05 44.979,24.05 52.979,24.05 6.979,28.05 10.979,28.05 14.979,28.05 22.979,28.05 26.979,28.05 30.979,28.05 38.979,28.05 42.979,28.05 53.721,31.242 4.979,32.05 8.979,32.05 12.979,32.05 16.979,32.05 24.979,32.05 28.979,32.05 36.979,32.05 40.979,32.05 68.979,32.05 6.979,36.05 46.979,36.05 4.979,40.05 8.979,40.05 12.979,40.05 16.979,40.05 20.979,40.05 44.979,40.05 64.979,40.05 68.979,40.05 10.979,44.05 14.979,44.05 18.979,44.05 22.979,44.05 26.979,44.05 30.979,44.05 34.979,44.05 38.979,44.05 42.979,44.05 50.979,44.05 54.979,44.05 58.979,44.05 62.979,44.05
LED: R12.2 U2.2 | length 4.2
  Top Layer w0.3: R12.2@51.562,30.601 51.424,30.601 51.124,30.301 51.124,27.49 U2.2
LED_G: J7.9 R9.1 | length 3.3
  Top Layer w0.6: J7.9 2.95,23.983 2.95,27.287 R9.1
LED_Y: J7.12 R8.1 | length 6.1
  Top Layer w0.6: J7.12 4.634,11.143 4.634,10.346 7.551,7.429 8.4,7.429 8.408,7.42 R8.1@8.408,7.369
MISO: U1.6 U2.16 | length 7.6
  Top Layer w0.3: U1.6 46.188,16.545 46.528,16.885 v2(46.609,16.885) ; v2(47.095,18.427) 47.152,18.485 47.457,18.485 U2.16
  Bottom Layer w0.3: v2(46.609,16.885) 46.609,17.941 v2(47.095,18.427)
MOSI: U1.7 U2.17 | length 6.9
  Top Layer w0.3: U1.7 45.903,17.195 46.224,17.516 47.195,17.516 U2.17
NetC1_2: C1.2 R2.2 U1.23 Y1.1 | length 9.6
  Top Layer w0.3: R2.2 30.646,17.096 32.551,17.096 32.476,17.171 C1.2@32.476,18.816 ; C1.2 C1.2@32.476,18.816 ; U1.23 36.664,16.635 35.7,16.635 35.024,17.311 35.024,17.926 34.804,18.146 33.301,18.146 32.851,18.596 32.631,18.816 C1.2@32.476,18.816
NetC2_2: C2.2 R2.1 U1.24 Y1.3 | length 10.9
  Top Layer w0.3: R2.1 30.857,15.107 31.652,15.902 33.224,15.902 34.199,14.927 C2.2@34.199,13.021 ; C2.2 C2.2@34.199,13.021 ; U1.24 36.664,15.805 35.7,15.805 35.504,15.609 35.504,14.326 C2.2@34.199,13.021
NetC3_1: C3.1 R1.1 SW1.2 U2.7 | length 19.5
  Top Layer w0.3: U2.7 50.487,24.592 50.806,24.592 52.962,26.747 52.962,36.44 50.292,39.11 50.292,40.663 SW1.2@50.082,40.873
NetC5_2: C5.2 R6.2 U2.5 Y2.1 | length 15.2
  Top Layer w0.3: R6.2 44.319,31.068 45.055,31.804 47.641,31.804 48.196,31.249 48.296,31.249 Y2.1 C5.2@48.641,32.506 ; C5.2 48.459,32.851 C5.2@48.677,32.633 ; C5.2@48.671,32.506 49.276,32.506 49.662,32.12 49.662,26.831 U2.5
NetC6_2: C6.2 R6.1 U2.6 Y2.3 | length 8.9
  Top Layer w0.3: R6.1 44.155,29.204 Y2.3 46.441,27.353 47.665,26.129 49.657,26.129 U2.6
NetC15_1: C15.1 U1.1
NetC20_1: C20.1 J7.4 L2.2 R17.2 R18.2 | length 28.4
  Top Layer w0.2: J7.4 13.464,18.28 12.573,19.171 12.573,22.981 15.494,25.902 18.354,25.902 20.168,24.088 L2.2
  Top Layer w0.3: R17.2 23.034,21.082 v2(24.003,21.082) ; v2(27.686,21.082) 28.655,21.082 R18.2
  Top Layer w0.6: L2.2 20.318,23.963 21.116,23.963 21.836,23.243 22.816,23.243 C20.1 R17.2@22.987,21.416
  Bottom Layer w0.3: v2(24.003,21.082) v2(27.686,21.082)
NetC22_1: C22.1 R15.2 R16.2 | length 6.7
  Top Layer w0.3: v2(20.192,17.518) 20.192,16.546 R16.2 ; v2(20.193,21.082) R15.2
  Top Layer w1.2: C22.1@20.193,15.107 R16.2@20.193,16.25
  Bottom Layer w0.3: v2@20.192,17.519 v2(20.193,21.082)
NetR3_2: R3.2 U2.44 | length 2.1
  Top Layer w0.3: U2.44 56.553,26.873 56.553,27.298 R3.2
NetR7_2: R7.2 U1.14 | length 2.6
  Top Layer w0.5: U1.14 43.932,21.745 43.942,21.755 R7.2@43.942,24.124
NetR8_2: R8.2 U1.27 | length 30
  Top Layer w0.3: R8.2 19.177,7.36 22.352,10.535 34.163,10.535 35.179,11.551 35.179,13.334 35.7,13.855 36.664,13.855 U1.27
NetR9_2: R9.2 U1.26 | length 47.2
  Top Layer w0.3: R9.2 4.912,27.049 5.842,26.119 5.842,23.501 ccw(c7.837,23.36) 5.842,23.219 5.842,20.314 14.478,11.678 21.359,11.678 21.613,11.932 v2(28.575,11.932) ; U1.26 38.178,14.595 38.354,14.419 v2(38.354,13.71)
  Bottom Layer w0.3: v2(28.575,11.932) 37.465,11.932 38.354,12.821 v2(38.354,13.71)
NetR11_1: R11.1 VD1.C | length 2.2
  Top Layer w0.6: R11.1 25.273,42.135 25.423,42.285 VD1.C
NetR12_1: R12.1 VD2.C | length 3.1
  Top Layer w0.3: R12.1 51.181,34.867 51.741,35.427 VD2.C
RESET: R5.1 U1.10 U2.42 | length 22.4
  Top Layer w0.3: U1.10 45.187,19.145 45.617,19.576 v2(45.698,19.576) ; U2.42 57.51,26.416 v2(57.531,26.416) ; v2@57.623,26.529 57.905,26.811 59.559,28.466 60.285,28.466 R5.1
  Bottom Layer w0.3: v2(45.698,19.576) 50.669,19.576 57.51,26.416 v2(57.531,26.416)
SCK: U1.8 U2.15 | length 6.2
  Top Layer w0.3: U1.8 45.619,17.845 47.234,19.46 47.725,19.46 U2.15
SWCLK: J6.3 U2.37 | length 27.9
  Top Layer w0.3: J6.3 55.205,5.161 62.163,12.119 62.163,22.794 60.452,24.505 59.134,24.505 U2.37
SWDIO: J6.2 U2.34 | length 29
  Top Layer w0.3: J6.2 52.705,7.614 53.975,8.884 54.081,8.99 53.43,9.641 54.001,10.213 55.195,9.019 55.766,9.59 54.573,10.784 55.144,11.355 56.338,10.161 56.909,10.733 55.715,11.927 56.287,12.498 56.938,11.847 57.094,12.003 58.42,13.329 58.42,19.487 U2.34
TPIN_N: J7.6 R16.1 U1.12 | length 31.6
  Top Layer w0.17: J7.6 17.724,16.737 17.724,18.693 17.713,18.704 17.713,18.844 18.018,19.15 19.528,19.15 19.627,19.05 19.627,18.86 19.993,18.495 R16.1 20.393,18.495 20.759,18.86 20.759,19.05 20.858,19.15 21.716,19.15 23.053,19.15 23.28,18.923 v2(23.368,18.923) ; v2(40.916,19.403) 40.978,19.465 40.978,19.785 41.815,20.622 42.687,20.622 42.709,20.6 43.609,20.6 U1.12
  Bottom Layer w0.17: v2(23.368,18.923) 23.456,18.923 23.683,19.15 31.884,19.15 31.95,19.084 40.277,19.084 40.534,19.341 40.854,19.341 v2(40.916,19.403)
TPIN_P: J7.3 R15.1 U1.13 | length 31.8
  Top Layer w0.17: J7.3 16.867,19.55 17.363,19.054 17.503,19.054 17.896,19.446 19.528,19.446 19.627,19.546 19.627,19.736 19.993,20.101 R15.1 20.393,20.101 20.759,19.736 20.759,19.546 20.858,19.446 21.839,19.446 23.053,19.446 23.28,19.673 v2(23.368,19.673) ; v2(40.386,19.933) 40.448,19.995 40.769,19.995 41.692,20.918 42.687,20.918 42.709,20.94 43.609,20.94 U1.13
  Bottom Layer w0.17: v2(23.368,19.673) 23.456,19.673 23.683,19.446 32.007,19.446 32.073,19.381 40.154,19.381 40.324,19.55 40.324,19.871 v2(40.386,19.933)
TPOUT_N: J7.2 R18.1 U1.16 | length 32.5
  Top Layer w0.17: J7.2 15.824,21.723 15.824,21.864 17.156,23.197 17.156,24.571 17.387,24.802 v2(17.387,24.886) ; v2(26.543,24.124) 26.481,24.062 26.16,24.062 25.991,23.892 25.991,22.605 25.993,22.603 25.993,21.343 26.092,21.244 26.543,21.244 R18.1 26.711,20.826 26.346,20.461 26.092,20.461 25.993,20.361 25.993,20.221 26.092,20.122 30.338,20.122 31.156,20.94 36.599,20.94 U1.16
  Bottom Layer w0.17: v2(17.387,24.886) 17.387,24.975 17.161,25.201 17.161,25.44 17.26,25.54 23.349,25.54 25.084,23.805 25.904,23.805 26.16,24.062 26.481,24.062 v2(26.543,24.124)
TPOUT_P: J7.1 R17.1 U1.17 | length 33.4
  Top Layer w0.17: J7.1 14.3,21.977 15.517,21.977 16.86,23.32 16.86,24.575 16.634,24.801 v2(16.634,24.889) ; v2(26.013,24.654) 25.951,24.592 25.951,24.272 25.694,24.015 25.694,22.482 25.696,22.48 25.696,21.343 25.597,21.244 25.146,21.244 R17.1 24.978,20.826 25.343,20.461 25.597,20.461 25.696,20.361 25.696,20.098 25.969,19.825 30.461,19.825 31.236,20.6 36.599,20.6 U1.17
  Bottom Layer w0.17: v2(16.634,24.889) 16.634,24.973 16.864,25.204 16.864,25.563 17.138,25.836 23.472,25.836 25.207,24.102 25.781,24.102 25.951,24.272 25.951,24.592 v2(26.013,24.654)
UART_RX: J3.1 U2.31 | length 36.6
  Top Layer w0.3: U2.31 56.996,18.79 v2(57.658,18.79)
  Bottom Layer w0.3: J3.1 57.023,34.919 58.039,33.903 64.897,33.903 68.199,30.601 68.199,22.333 64.656,18.79 v2(57.658,18.79)
UART_TX: J3.2 U2.30 | length 36.1
  Top Layer w0.3: U2.30 56.993,18.085 57.093,18.085 v2(57.15,18.028)
  Bottom Layer w0.3: v2(57.15,18.028) 57.207,18.085 64.545,18.085 68.961,22.501 68.961,30.761 64.859,34.863 60.127,34.863 59.563,35.427 J3.2
pads on no net: J7.5 J7.7 J7.15 J7.16 U1.3 U1.4 U1.5 U2.1 U2.3 U2.4 U2.10 U2.18 U2.19 U2.20 U2.21 U2.22 U2.29 U2.32 U2.33 U2.38 U2.40 U2.41 U2.43 U2.45 U2.46

## Polygon pours and split planes (outlines as drawn)
GND on Top Layer "NETJ2_2_L04_P-001" (solid, pour order 9): 0,48 73,48 73,0 0,0
3V3 on Top Layer "NETJ2_2_L04_P-001" (solid, pour order 8): 53.467,35.935 53.467,32.633 55.689,30.411 53.34,28.061 53.34,26.918 53.785,26.473 57.531,30.22 63.627,30.22 66.929,33.522 66.929,35.809 66.457,36.316 65.532,36.316 63.754,38.094 63.754,41.65 62.611,41.65 62.611,37.967 64.135,36.443 64.135,34.665 56.134,34.665 54.864,35.935
NetC3_1 on Top Layer "NETJ2_2_L04_P-001" (solid, pour order 7): 61.722,42.92 61.722,40.126 61.214,39.618 48.133,39.618 47.117,40.634 47.117,42.92
3V3 on Top Layer "NETJ2_2_L04_P-001" (solid, pour order 1): 42.799,41.523 42.799,35.173 42.164,34.538 36.15,34.538 36.15,24.378 36.53,24.116 39.243,24.112 39.243,10.662 35.741,10.662 35.741,21.252 34.343,22.395 34.343,34.538 30.861,34.538 28.575,36.824 28.575,38.094 24.892,38.094 24.511,38.475 24.511,40.38 24.892,40.761 29.21,40.761 30.48,42.031 42.291,42.031
NetC15_1 on Top Layer "NETJ2_2_L04_P-001" (solid, pour order 5): 42.799,13.53 44.76,13.53 44.76,7.995 42.799,7.995
+12V on Top Layer "NETJ2_2_L04_P-001" (solid, pour order 0): 9.271,37.332 9.525,37.586 12.827,37.586 13.589,36.824 19.05,36.824 19.05,35.93 17.653,35.93 17.653,35.173 16.51,34.03 12.319,34.03 11.176,32.887 9.271,32.887
GND on Bottom Layer "NETJ2_2_L04_P-001" (solid, pour order 10): 0,48 73,48 73,-0.006 0,-0.006

## Silkscreen, mask and mechanical layers (free items; w line width, h text height)
Board Shape:
  the board outline again, w0.254

## Text inside footprints (layer, text, board x,y; h text height)
J6: Top Overlay "GND" at 58.061,4.82 h1.27 r90; Top Overlay "SWDIO" at 53.173,4.82 h1.27 r90; Top Overlay "SWCLK" at 55.713,4.82 h1.27 r90; Top Overlay "+3.3V" at 50.82,4.82 h1.27 r90